# Altium PCB PDB.PcbDoc (part 2 of 3)
Units mil, origin at the board's own origin, x right, y up, seen from the top; angles counter-clockwise.
Board outline 4724.41 x 3149.61 mil, 2 copper layers (Top Layer, Bottom Layer); 64 components, 33 nets, 163 pads, 36 vias.
Unrouted connection lines stored in the file: 2.
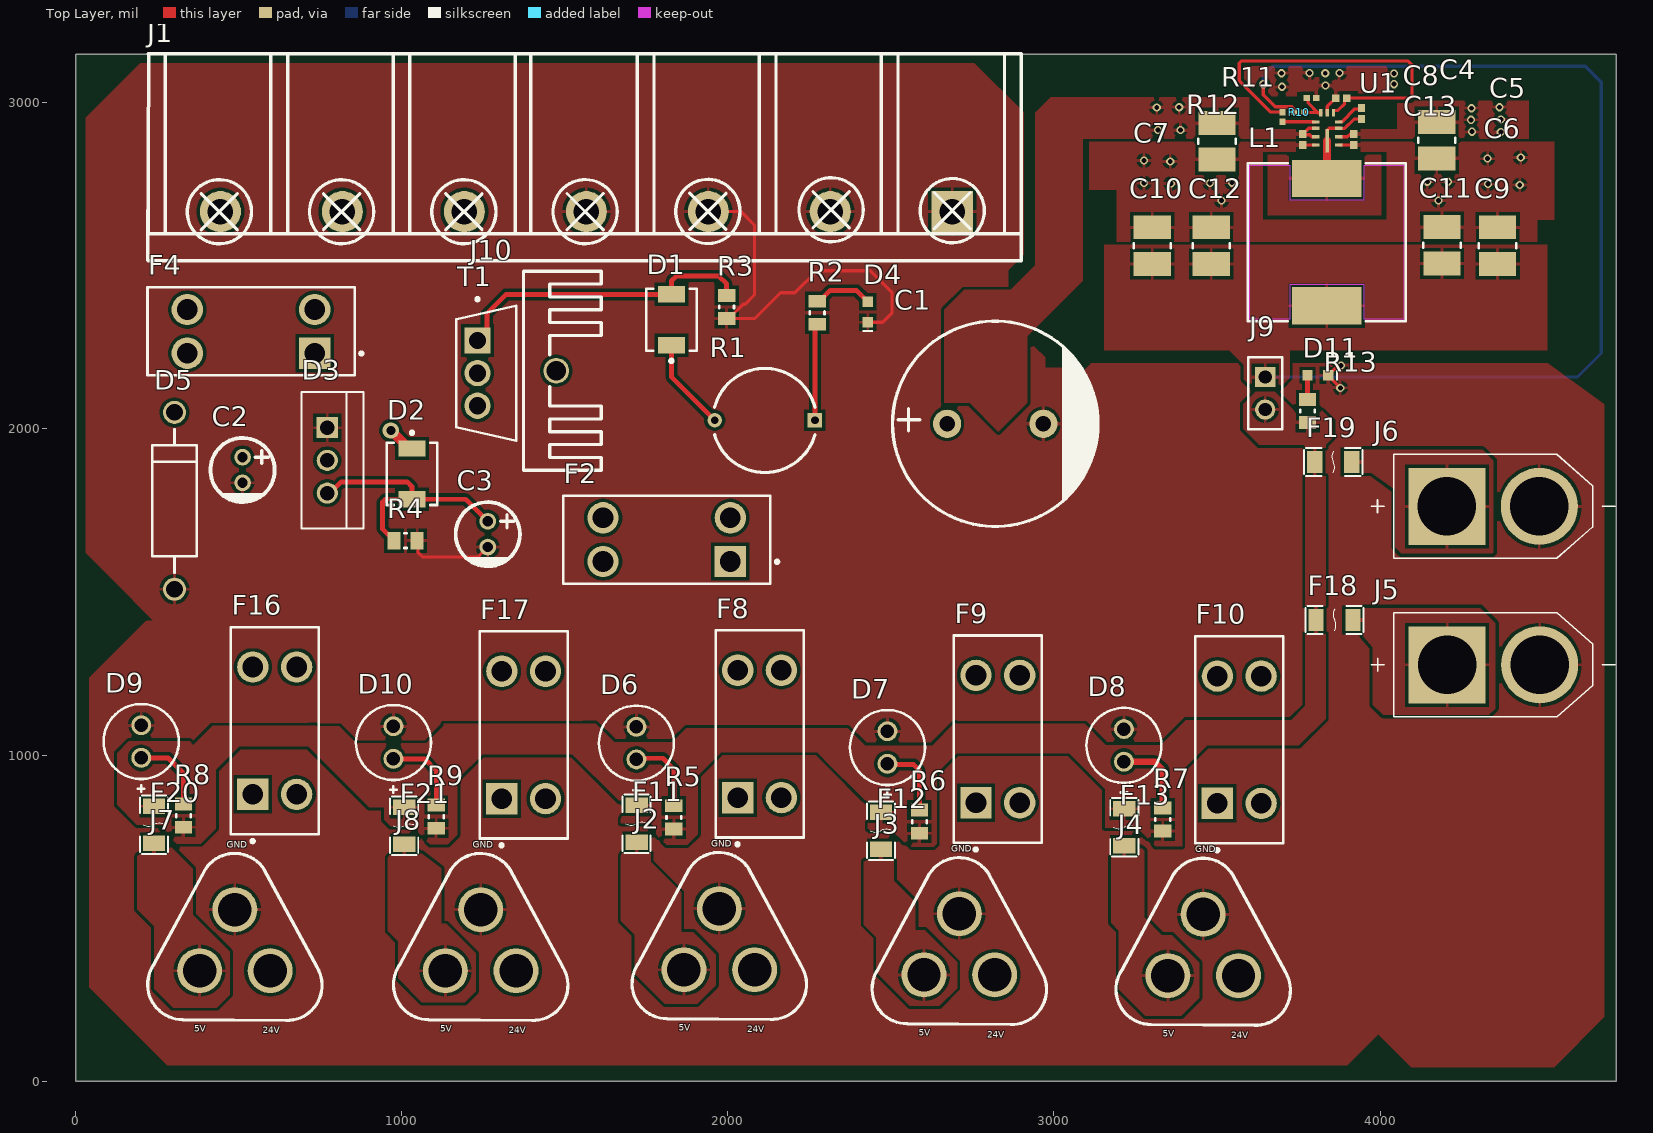
[diagram p0: Top Layer view]

## Part data (continued)
D5: library part P6KE27ARLG, "600 Watt SUR40 Transient Voltage Suppressor, 27 V, Unidirectional", Breakdown Voltage=27.05V, Case/Package=Axial, Clamping Voltage=37.5V, LCSC Part No=C3707914, Leakage Current=5µA, Manufacturer=onsemi, Max Breakdown Voltage=28.4V, Max Operating Temperature=150°C, Max Power Dissipation=5W, Max Surge Current=16A, Min Breakdown Voltage=25.7V, Min Operating Temperature=-55°C, Operating Supply Voltage=23.1V, Peak Pulse Power=600W, Power Line Protection=No, Supplier Part Number=P6KE27ARLG-158866, Test Current=1mA, Category="TVS Diodes", China RoHS=Non-Compliant, componentlink1description=https://datasheet.octopart.com:443/P6KE27ARLG-ON-Semiconductor-datasheet-8361193.pdf?src-supplier=IHS, componentlink1url=https://datasheet.octopart.com:443/P6KE27ARLG-ON-Semiconductor-datasheet-8361193.pdf?src-supplier=IHS, ComponentLink2Description=https://datasheet.octopart.com:443/P6KE27ARLG-ON-Semiconductor-datasheet-5320614.pdf?src-supplier=onsemi, ComponentLink2URL=https://datasheet.octopart.com:443/P6KE27ARLG-ON-Semiconductor-datasheet-5320614.pdf?src-supplier=onsemi, ComponentLink3Description=https://datasheet.octopart.com:443/P6KE27ARLG-onsemi-datasheet-79626349.pdf?src-supplier=Farnell, ComponentLink3URL=https://datasheet.octopart.com:443/P6KE27ARLG-onsemi-datasheet-79626349.pdf?src-supplier=Farnell, ComponentLink4Description=http://sigma.octopart.com:80/reach_statement/ON-Semiconductor-company-79.pdf?src-supplier=Compliance+Statements, ComponentLink4URL=http://sigma.octopart.com:80/reach_statement/ON-Semiconductor-company-79.pdf?src-supplier=Compliance+Statements, ComponentLink5Description=https://octopart.com:443/opatz8j6/c1?t=2cJTaBfKdbaYfiIibkn32kFJN2rkQAxk7M-zdmCFLNYhDS4Q_M0VQkaOAo5Ijtsf6TEss0vlvxYVSuDQTRZP4OvQV2pXsbQ98v0s9K6hdiFStXveO6nhAUnzDXp5xHxKIFKd8f_nnKbZC-l5hdBFgFSLLzjiWU1mRDFWwLSmSyFNQzmDyJ0WyQpSZN_85hCm8lhg27LncNlkqwz2W0BQiMb47LSU24ywtnWJBrffDSUFoIOy5DRvi26unpeOfRJUZq5vb6J1HvpVsqMMnuUvQDgpfylJ3jskX1SzE2wqL06L0laSWrQj0crcyI1tb60BYAje57qsLb2d2LwrmFq9ygYxyN3BPTigX2aIOQ&src-supplier=Compliance+Statements, ComponentLink5URL=https://octopart.com:443/opatz8j6/c1?t=2cJTaBfKdbaYfiIibkn32kFJN2rkQAxk7M-zdmCFLNYhDS4Q_M0VQkaOAo5Ijtsf6TEss0vlvxYVSuDQTRZP4OvQV2pXsbQ98v0s9K6hdiFStXveO6nhAUnzDXp5xHxKIFKd8f_nnKbZC-l5hdBFgFSLLzjiWU1mRDFWwLSmSyFNQzmDyJ0WyQpSZN_85hCm8lhg27LncNlkqwz2W0BQiMb47LSU24ywtnWJBrffDSUFoIOy5DRvi26unpeOfRJUZq5vb6J1HvpVsqMMnuUvQDgpfylJ3jskX1SzE2wqL06L0laSWrQj0crcyI1tb60BYAje57qsLb2d2LwrmFq9ygYxyN3BPTigX2aIOQ&src-supplier=Compliance+Statements, Composition=Zener, Contact Plating=Tin, Country of Origin="Mainland China", Direction=Unidirectional, Element Configuration=Single, Export Control Classification Number (ECCN) Code=EAR99, Harmonized Tariff Schedule (HTS) Code=8541.10.00.50, Introduction Date=1999-01-01, Lead Free="Lead Free", Manufacturer Part Number=P6KE27ARLG, Max Reverse Leakage Current=5µA, Number of Channels=1, Number of Elements=1, Number of Terminals=2, Number of Unidirectional Channels=1, Packaging="Tape and Reel", Peak Pulse Current=16A, Pins=2, Polarity=Unidirectional, Power Dissipation=600W, Pricing="100=0.06, 1000=0.06, 10000=0.06 (USD)", Radiation Hardening=No, REACH SVHC=No, Reverse Breakdown Voltage=25.7V, Reverse Standoff Voltage=23.1V, RoHS=Compliant, Stock=5900, Supplier="Bison Technologies", Termination=Axial
D6 D7 D8 D9 D10: library part HLMP-4740, "Round with Domed Top HLMP-4740 SINGLE COLOR LED Green LED Indication Discrete 6.1mm 5V 2mA 2.3mcd", Case/Package=Radial, Color=Green, Forward Current=7mA, Forward Voltage=2.2V, LCSC Part No=C7466713, Manufacturer=Broadcom, Max Operating Temperature=100°C, Max Power Dissipation=15.4mW, Min Operating Temperature=-20°C, Reverse Voltage=5V, Test Current=2mA, Category=LEDs, China RoHS=Compliant, componentlink1description=https://datasheet.octopart.com:443/HLMP-4740-Broadcom-datasheet-179994660.pdf?src-supplier=IHS, componentlink1url=https://datasheet.octopart.com:443/HLMP-4740-Broadcom-datasheet-179994660.pdf?src-supplier=IHS, ComponentLink2Description=https://datasheet.octopart.com:443/HLMP-4740-Broadcom-datasheet-10307821.pdf?src-supplier=Future+Electronics, ComponentLink2URL=https://datasheet.octopart.com:443/HLMP-4740-Broadcom-datasheet-10307821.pdf?src-supplier=Future+Electronics, ComponentLink3Description=https://datasheet.octopart.com:443/HLMP-4740-Avago-datasheet-8325423.pdf?src-supplier=Future+Electronics, ComponentLink3URL=https://datasheet.octopart.com:443/HLMP-4740-Avago-datasheet-8325423.pdf?src-supplier=Future+Electronics, ComponentLink4Description=https://datasheet.octopart.com:443/HLMP-4740-Broadcom-datasheet-41234193.pdf?src-supplier=Avago, ComponentLink4URL=https://datasheet.octopart.com:443/HLMP-4740-Broadcom-datasheet-41234193.pdf?src-supplier=Avago, ComponentLink5Description=https://datasheet.octopart.com:443/HLMP-4740-Broadcom-datasheet-26590252.pdf?src-supplier=Newark, ComponentLink5URL=https://datasheet.octopart.com:443/HLMP-4740-Broadcom-datasheet-26590252.pdf?src-supplier=Newark, ComponentLink6Description=https://datasheet.octopart.com:443/HLMP-4740-Avago-datasheet-3474.pdf?src-supplier=Newark, ComponentLink6URL=https://datasheet.octopart.com:443/HLMP-4740-Avago-datasheet-3474.pdf?src-supplier=Newark, ComponentLink7Description=https://datasheet.octopart.com:443/HLMP-4740-Avago-datasheet-15068216.pdf?src-supplier=element14+APAC, ComponentLink7URL=https://datasheet.octopart.com:443/HLMP-4740-Avago-datasheet-15068216.pdf?src-supplier=element14+APAC, ComponentLink8Description=https://datasheet.octopart.com:443/HLMP-4740-Avago-datasheet-9617573.pdf?src-supplier=RS+(Formerly+Allied+Electronics), ComponentLink8URL=https://datasheet.octopart.com:443/HLMP-4740-Avago-datasheet-9617573.pdf?src-supplier=RS+(Formerly+Allied+Electronics), ComponentLink9Description=https://datasheet.octopart.com:443/HLMP-4740-Avago-datasheet-87738.pdf?src-supplier=RS+(Formerly+Allied+Electronics), ComponentLink9URL=https://datasheet.octopart.com:443/HLMP-4740-Avago-datasheet-87738.pdf?src-supplier=RS+(Formerly+Allied+Electronics), Contact Plating=Tin, Depth=6.1mm, Diameter=5.08mm, Dominant Wavelength=569nm, Export Control Classification Number (ECCN) Code=EAR99, Harmonized Tariff Schedule (HTS) Code=8541.41.00.00, Height=8.81mm, Illumination Color=Green, Introduction Date=1992-01-01, Lead Free="Lead Free", Lead Length=25mm, Length=6.1mm, Lens Color=Green, Lens Size=5mm, Lens Style=Diffused, Lens Transparency=Diffused, Lifecycle Status=Production, Luminous Intensity=1mcd, Manufacturer Part Number=HLMP-4740, Mounting Technology="PCB, Through Hole", Number of Circuits=1, Number of Elements=1, Number of LEDs=1, Number of Terminals=1, Packaging=Bulk, Peak Wavelength=565nm, Pins=2, Power Dissipation=15.4mW, Pricing="2000=0.16434, 4000=0.16351, 8000=0.16268, 16000=0.16185, 32000=0.16102 (USD)", Radiation Hardening=No, REACH SVHC=Yes, RoHS=Compliant, Shape=Round, Stock=3902, Supplier=Avnet, Supplier Part Number=HLMP-4740, Terminal Pitch=2.54mm, Viewing Angle=50°, Wavelength=569nm
F2 F4 F8 F9 F10 F16 F17: library part 3568, "Holder; Fuse; Auto Blade; Mini; 500VAC; 30A; PC Pin Terminal; Nylon 4/6 Holder; Black", Color=Black, Current Rating=20A, Flammability Rating="UL94 V-0", Manufacturer=Keystone, Max Operating Temperature=145°C, Min Operating Temperature=-50°C, Voltage=500V, Approvals=UL, Body Material=Nylon, Category="Fuse Holders", componentlink1description=https://datasheet.octopart.com:443/3568-Keystone-datasheet-137335555.pdf?src-supplier=Upverter, componentlink1url=https://datasheet.octopart.com:443/3568-Keystone-datasheet-137335555.pdf?src-supplier=Upverter, ComponentLink2Description=https://datasheet.octopart.com:443/3568-Keystone-datasheet-15715963.pdf?src-supplier=Future+Electronics, ComponentLink2URL=https://datasheet.octopart.com:443/3568-Keystone-datasheet-15715963.pdf?src-supplier=Future+Electronics, ComponentLink3Description=https://datasheet.octopart.com:443/3568-Keystone-datasheet-7589202.pdf?src-supplier=Future+Electronics, ComponentLink3URL=https://datasheet.octopart.com:443/3568-Keystone-datasheet-7589202.pdf?src-supplier=Future+Electronics, ComponentLink4Description=https://datasheet.octopart.com:443/3568-Keystone-datasheet-137916591.pdf?src-supplier=Future+Electronics, ComponentLink4URL=https://datasheet.octopart.com:443/3568-Keystone-datasheet-137916591.pdf?src-supplier=Future+Electronics, ComponentLink5Description=https://datasheet.octopart.com:443/3568-Keystone-datasheet-21202853.pdf?src-supplier=element14+APAC, ComponentLink5URL=https://datasheet.octopart.com:443/3568-Keystone-datasheet-21202853.pdf?src-supplier=element14+APAC, ComponentLink6Description=https://datasheet.octopart.com:443/3568-Keystone-datasheet-10928834.pdf?src-supplier=RS+(Formerly+Allied+Electronics), ComponentLink6URL=https://datasheet.octopart.com:443/3568-Keystone-datasheet-10928834.pdf?src-supplier=RS+(Formerly+Allied+Electronics), ComponentLink7Description=https://datasheet.octopart.com:443/3568-Keystone-datasheet-110727069.pdf?src-supplier=RS+(Formerly+Allied+Electronics), ComponentLink7URL=https://datasheet.octopart.com:443/3568-Keystone-datasheet-110727069.pdf?src-supplier=RS+(Formerly+Allied+Electronics), ComponentLink8Description=https://datasheet.octopart.com:443/3568-Keystone-datasheet-17577430.pdf?src-supplier=TME, ComponentLink8URL=https://datasheet.octopart.com:443/3568-Keystone-datasheet-17577430.pdf?src-supplier=TME, Contact Material=Brass, Contact Plating=Tin, Country of Origin=USA, Depth=6.73mm, Fuse Current=20A, Illumination Type=Illuminated, Introduction Date=2015-08-28, Lead Free="Lead Free", Length=16mm, Lifecycle Status=Production, Manufacturer Part Number=3568, Material="Brass, Nylon, Tin", Mounting Technology="PCB, Vertical", Number of Circuits=1, Number of Poles=1, Orientation=Vertical, Pricing="30=0.74, 100=0.72, 250=0.71, 1000=0.69, 2500=0.66 (USD)", REACH SVHC=Yes, RoHS=Compliant, Stock=77707, Supplier="Future Electronics", Supplier Part Number=3568, Termination="PC Pin", Voltage Rating (AC)=500V
F11 F12 F13 F18 F19 F20 F21: library part 04661.25NRHF, "Fuse 63V Fa Halogen Free Slim 1206 1.25A/ T&r Rohs Compliant: Yes", Current Rating=1.25A, Manufacturer=Littelfuse, Max Operating Temperature=90°C, Min Operating Temperature=-55°C, Power Dissipation=107.1mW, Ratings="CE, CSA, TUV", Supplier Part Number=F11418CT-ND, Voltage Rating (AC)=63V, Category=Fuses, China RoHS=Compliant, componentlink1description=https://datasheet.octopart.com:443/04661.25NRHF-Littelfuse-datasheet-166915437.pdf?src-supplier=IHS, componentlink1url=https://datasheet.octopart.com:443/04661.25NRHF-Littelfuse-datasheet-166915437.pdf?src-supplier=IHS, ComponentLink2Description=https://datasheet.octopart.com:443/04661.25NRHF-Littelfuse-datasheet-120226766.pdf?src-supplier=ODG+(Origin+Data+Global), ComponentLink2URL=https://datasheet.octopart.com:443/04661.25NRHF-Littelfuse-datasheet-120226766.pdf?src-supplier=ODG+(Origin+Data+Global), ComponentLink3Description=https://datasheet.octopart.com:443/04661.25NRHF-Littelfuse-datasheet-170674135.pdf?src-supplier=JRH+Electronics, ComponentLink3URL=https://datasheet.octopart.com:443/04661.25NRHF-Littelfuse-datasheet-170674135.pdf?src-supplier=JRH+Electronics, ComponentLink4Description=https://datasheet.octopart.com:443/04661.25NRHF-Littelfuse-datasheet-178296321.pdf?src-supplier=Burklin+Elektronik, ComponentLink4URL=https://datasheet.octopart.com:443/04661.25NRHF-Littelfuse-datasheet-178296321.pdf?src-supplier=Burklin+Elektronik, ComponentLink5Description=https://datasheet.octopart.com:443/04661.25NRHF-Littelfuse-datasheet-183575681.pdf?src-supplier=Sager+Electronics, ComponentLink5URL=https://datasheet.octopart.com:443/04661.25NRHF-Littelfuse-datasheet-183575681.pdf?src-supplier=Sager+Electronics, ComponentLink6Description=https://datasheet.octopart.com:443/04661.25NRHF-Littelfuse-datasheet-24896369.pdf?src-supplier=Fuses+Unlimited, ComponentLink6URL=https://datasheet.octopart.com:443/04661.25NRHF-Littelfuse-datasheet-24896369.pdf?src-supplier=Fuses+Unlimited, Export Control Classification Number (ECCN) Code=EAR99, Harmonized Tariff Schedule (HTS) Code=8536.10.00.40, Height=584µm, Introduction Date=2008-01-16, Length=3.175mm, Lifecycle Status=Production, Manufacturer Part Number=04661.25NRHF, Mounting Technology="Surface Mount", Pricing="1=1.14, 5=0.946, 10=0.873, 50=0.7246, 100=0.6685, 250=0.60084, 500=0.55408, 1000=0.51077 (USD)", REACH SVHC=No, RoHS=Compliant, Stock=8292, Supplier=DigiKey, Time to Trip=200ms, Voltage Rating (DC)=63V
J1: library part "Terminal Connectors 6", "5.08mm Pitch Eurostyle Vertical Fixed Mount PCB Terminal Block, 6 Circuits", Color=Black, Current Rating=15A, Flammability Rating="UL94 V-0", LCSC Part No=C587506, Manufacturer=Molex, Manufacturer Lifecycle Status=ACTIVE, Manufacturer Part Number=39544-3006, Max Operating Temperature=105°C, Min Operating Temperature=-40°C, Supplier Part Number=0395443006, Voltage Rating=300V, Approvals="UL, cUL", Category="Terminal Blocks", China RoHS=Compliant, componentlink1description=https://datasheet.octopart.com:443/395443006-Molex-datasheet-138897636.pdf?src-supplier=IHS, componentlink1url=https://datasheet.octopart.com:443/395443006-Molex-datasheet-138897636.pdf?src-supplier=IHS, ComponentLink2Description=https://datasheet.octopart.com:443/39544-3006-Molex-datasheet-15647497.pdf?src-supplier=Molex, ComponentLink2URL=https://datasheet.octopart.com:443/39544-3006-Molex-datasheet-15647497.pdf?src-supplier=Molex, ComponentLink3Description=https://datasheet.octopart.com:443/395443006-Molex-datasheet-8340186.pdf?src-supplier=Molex, ComponentLink3URL=https://datasheet.octopart.com:443/395443006-Molex-datasheet-8340186.pdf?src-supplier=Molex, ComponentLink4Description=https://datasheet.octopart.com:443/39544-3006-Molex-datasheet-193100652.pdf?src-supplier=JRH+Electronics, ComponentLink4URL=https://datasheet.octopart.com:443/39544-3006-Molex-datasheet-193100652.pdf?src-supplier=JRH+Electronics, ComponentLink5Description=https://datasheet.octopart.com:443/39544-3006-Molex-datasheet-101582495.pdf?src-supplier=Farnell, ComponentLink5URL=https://datasheet.octopart.com:443/39544-3006-Molex-datasheet-101582495.pdf?src-supplier=Farnell, ComponentLink6Description=https://datasheet.octopart.com:443/39544-3006-Molex-datasheet-154750061.pdf?src-supplier=Master+Electronics, ComponentLink6URL=https://datasheet.octopart.com:443/39544-3006-Molex-datasheet-154750061.pdf?src-supplier=Master+Electronics, ComponentLink7Description=https://datasheet.octopart.com:443/39544-3006-Molex-datasheet-62280869.pdf?src-supplier=Electro+Sonic, ComponentLink7URL=https://datasheet.octopart.com:443/39544-3006-Molex-datasheet-62280869.pdf?src-supplier=Electro+Sonic, ComponentLink8Description=https://datasheet.octopart.com:443/39544-3006-Molex-datasheet-44402560.pdf?src-supplier=Electro+Sonic, ComponentLink8URL=https://datasheet.octopart.com:443/39544-3006-Molex-datasheet-44402560.pdf?src-supplier=Electro+Sonic, ComponentLink9Description=https://datasheet.octopart.com:443/39544-3006-Molex-datasheet-34199391.pdf?src-supplier=Newark, ComponentLink9URL=https://datasheet.octopart.com:443/39544-3006-Molex-datasheet-34199391.pdf?src-supplier=Newark, ComponentLink10Description=https://datasheet.octopart.com:443/39544-3006-Molex-datasheet-33003022.pdf?src-supplier=Newark, ComponentLink10URL=https://datasheet.octopart.com:443/39544-3006-Molex-datasheet-33003022.pdf?src-supplier=Newark, ComponentLink11Description=https://datasheet.octopart.com:443/39544-3006-Molex-datasheet-21207647.pdf?src-supplier=Newark, ComponentLink11URL=https://datasheet.octopart.com:443/39544-3006-Molex-datasheet-21207647.pdf?src-supplier=Newark, ComponentLink12Description=https://datasheet.octopart.com:443/39544-3006-Molex-datasheet-5315843.pdf?src-supplier=Verical, ComponentLink12URL=https://datasheet.octopart.com:443/39544-3006-Molex-datasheet-5315843.pdf?src-supplier=Verical, ComponentLink13Description=https://datasheet.octopart.com:443/39544-3006-Molex-datasheet-118853.pdf?src-supplier=DigiKey, ComponentLink13URL=https://datasheet.octopart.com:443/39544-3006-Molex-datasheet-118853.pdf?src-supplier=DigiKey, ComponentLink14Description=https://datasheet.octopart.com:443/39544-3006-Molex-datasheet-20203.pdf?src-supplier=element14, ComponentLink14URL=https://datasheet.octopart.com:443/39544-3006-Molex-datasheet-20203.pdf?src-supplier=element14, ComponentLink15Description=http://sigma.octopart.com:80/15647498/rohs_certificate/Molex-39544-3006.pdf?src-supplier=Compliance+Statements, ComponentLink15URL=http://sigma.octopart.com:80/15647498/rohs_certificate/Molex-39544-3006.pdf?src-supplier=Compliance+Statements, ComponentLink16Description=http://sigma.octopart.com:80/reach_statement/Molex-company-74.pdf?src-supplier=Compliance+Statements, ComponentLink16URL=http://sigma.octopart.com:80/reach_statement/Molex-company-74.pdf?src-supplier=Compliance+Statements, ComponentLink17Description=http://sigma.octopart.com:80/rohs_statement/Molex-company-73.pdf?src-supplier=Compliance+Statements, ComponentLink17URL=http://sigma.octopart.com:80/rohs_statement/Molex-company-73.pdf?src-supplier=Compliance+Statements, ComponentLink18Description=http://sigma.octopart.com:80/conflict_mineral_statement/Molex-company-72.pdf?src-supplier=Compliance+Statements, ComponentLink18URL=http://sigma.octopart.com:80/conflict_mineral_statement/Molex-company-72.pdf?src-supplier=Compliance+Statements, Contact Material=Brass, Contact Plating=Tin, Country of Origin=US, ELV=Compliant, Export Control Classification Number (ECCN) Code=EAR99, Halogen Free="Low Halogen", Harmonized Tariff Schedule (HTS) Code=8536.90.40.00, Height=14.4mm, Housing Color=Black, Housing Material=Nylon, Introduction Date=2007-04-03, Lead Free="Lead Free", Length=30.48mm, Lifecycle Status=Production, Mounting Technology=Screw, Number of Circuits=5, Number of Contacts=6, Number of Levels=1, Number of Positions=6, Number of Rows=1, Orientation=Vertical, Packaging=Bulk, Pins=6, Pitch=5.08mm, Pricing="1=2.8662, 10=2.1815, 25=1.9364, 50=1.7714, 100=1.6311, 480=1.4072, 960=1.353 (USD)", REACH SVHC=No, RoHS=Compliant, Schedule B="8536695050, 8536695050|8536695050|8536695050|8536695050|8536695050", Stock=960, Supplier="Arrow Electronics", Termination=Solder, Wire/Cable Gauge=12AWG
J2 J3 J4 J7 J8: library part MT-60, LCSC part #=C99176
J5 J6: library part PRT-10474, "Conn DC Power Adapter M/F 2 POS ST 2 Terminal 1 Port", Manufacturer=SparkFun, Category="Headers and Wire Housings", componentlink1description=https://datasheet.octopart.com:443/PRT-10474-SparkFun-datasheet-154936240.pdf?src-supplier=Upverter, componentlink1url=https://datasheet.octopart.com:443/PRT-10474-SparkFun-datasheet-154936240.pdf?src-supplier=Upverter, Manufacturer Part Number=PRT-10474, Number of Contacts=2, Number of Rows=1, Pricing="1=3.279 (USD)", RoHS=Compliant, Supplier="Arrow Electronics", Supplier Part Number=PRT-10474
J9: library part M20-9990246, "CONN HEADER VERT 2POS 2.54MM / Connector Header Through Hole 2 position 0.100\" (2.54mm)", Case/Package=SIL, Color=Black, Contact Resistance=30mΩ, Current Rating=3A, Dielectric Material=Polyamide, Insulation Resistance=1GΩ, LCSC Part No=C3332353, Manufacturer=Harwin, Max Operating Temperature=105°C, Min Operating Temperature=-40°C, Supplier Part Number=952-2262-ND, Voltage Rating (AC)=750V, Category="Headers and Wire Housings", componentlink1description=https://datasheet.octopart.com:443/M20-9990246-Harwin-datasheet-169407857.pdf?src-supplier=Newark, componentlink1url=https://datasheet.octopart.com:443/M20-9990246-Harwin-datasheet-169407857.pdf?src-supplier=Newark, ComponentLink2Description=https://datasheet.octopart.com:443/M20-9990246-Harwin-datasheet-27378916.pdf?src-supplier=Newark, ComponentLink2URL=https://datasheet.octopart.com:443/M20-9990246-Harwin-datasheet-27378916.pdf?src-supplier=Newark, ComponentLink3Description=https://datasheet.octopart.com:443/M20-9990246-Harwin-datasheet-96624206.pdf?src-supplier=element14+APAC, ComponentLink3URL=https://datasheet.octopart.com:443/M20-9990246-Harwin-datasheet-96624206.pdf?src-supplier=element14+APAC, ComponentLink4Description=https://datasheet.octopart.com:443/M20-9990246-Harwin-datasheet-32864541.pdf?src-supplier=Farnell, ComponentLink4URL=https://datasheet.octopart.com:443/M20-9990246-Harwin-datasheet-32864541.pdf?src-supplier=Farnell, ComponentLink5Description=https://datasheet.octopart.com:443/M20-9990246-Harwin-datasheet-7538443.pdf?src-supplier=Farnell, ComponentLink5URL=https://datasheet.octopart.com:443/M20-9990246-Harwin-datasheet-7538443.pdf?src-supplier=Farnell, ComponentLink6Description=https://datasheet.octopart.com:443/M20-9990246-Harwin-datasheet-508868.pdf?src-supplier=Farnell, ComponentLink6URL=https://datasheet.octopart.com:443/M20-9990246-Harwin-datasheet-508868.pdf?src-supplier=Farnell, Connector Type="Male Pin", Contact Material=Brass, Contact Mating Length=6.096mm, Contact Plating=Tin, Country of Origin=Taiwan, Depth=2.54mm, Export Control Classification Number (ECCN) Code=EAR99, Gender=Male, Harmonized Tariff Schedule (HTS) Code=8536.69.40.40, Height=8.99mm, Housing Color=Black, Housing Material=Nylon, Introduction Date=2005-06-27, Lead Pitch=2.54mm, Length=5.08mm, Lifecycle Status=Production, Manufacturer Part Number=M20-9990246, Max Current Rating=3A, Mounting Technology="Through Hole", Number of Contacts=2, Number of Positions=2, Number of Rows=1, Orientation=Straight, Packaging=Bulk, Pins=2, Pitch=2.54mm, Pricing="1=0.1, 10=0.079, 100=0.0669, 500=0.0597, 1000=0.05684, 5000=0.05073, 10000=0.04831 (USD)", Radiation Hardening=No, REACH SVHC=Yes, RoHS=Compliant, Stock=114297, Supplier=DigiKey, Terminal Pitch=2.54mm, Termination=Solder
J10: library part 513001B02500G, "TO-220 Package 13.4 C/W Thermal Resistance Large Radial Fin Heat Sink", Case/Package=TO-218, Color=Black, Manufacturer="Aavid Thermalloy", Natural Thermal Resistance=13.4°C/W, Supplier Part Number=532-513001B25G, Thermal Resistance @ Forced Air Flow (100 LFM)=4°C/W, Category="Heat Sinks", componentlink1description=https://datasheet.octopart.com:443/513001B02500G-Aavid-Thermalloy-datasheet-111182914.pdf?src-supplier=IHS, componentlink1url=https://datasheet.octopart.com:443/513001B02500G-Aavid-Thermalloy-datasheet-111182914.pdf?src-supplier=IHS, ComponentLink2Description=https://datasheet.octopart.com:443/513001B02500G-Aavid-Thermalloy-datasheet-182190711.pdf?src-supplier=IHS, ComponentLink2URL=https://datasheet.octopart.com:443/513001B02500G-Aavid-Thermalloy-datasheet-182190711.pdf?src-supplier=IHS, ComponentLink3Description=https://datasheet.octopart.com:443/513001B02500G-Aavid-Thermalloy-datasheet-116638641.pdf?src-supplier=Sager+Electronics, ComponentLink3URL=https://datasheet.octopart.com:443/513001B02500G-Aavid-Thermalloy-datasheet-116638641.pdf?src-supplier=Sager+Electronics, ComponentLink4Description=https://datasheet.octopart.com:443/513001B02500G-Aavid-Thermalloy-datasheet-12547168.pdf?src-supplier=Future+Electronics, ComponentLink4URL=https://datasheet.octopart.com:443/513001B02500G-Aavid-Thermalloy-datasheet-12547168.pdf?src-supplier=Future+Electronics, ComponentLink5Description=https://datasheet.octopart.com:443/513001B02500G-Aavid-Thermalloy-datasheet-12511871.pdf?src-supplier=Future+Electronics, ComponentLink5URL=https://datasheet.octopart.com:443/513001B02500G-Aavid-Thermalloy-datasheet-12511871.pdf?src-supplier=Future+Electronics, ComponentLink6Description=http://sigma.octopart.com:80/conflict_mineral_statement/Aavid-Thermalloy-company-26.pdf?src-supplier=Compliance+Statements, ComponentLink6URL=http://sigma.octopart.com:80/conflict_mineral_statement/Aavid-Thermalloy-company-26.pdf?src-supplier=Compliance+Statements, Depth=12.7mm, Export Control Classification Number (ECCN) Code=EAR99, Harmonized Tariff Schedule (HTS) Code=8541.90.00.00, Height=25.4mm, Height Off Base=12.7mm, Introduction Date=2012-05-15, Lead Free="Lead Free", Length=34.92mm, Lifecycle Status=Production, Manufacturer Part Number=513001B02500G, Material="Aluminium, Anodized", Mounting Technology="Through Hole", Packaging=Box, Pricing="1=1.68, 10=1.53, 50=1.45, 100=1.37, 1000=1.09, 10000=1.08 (USD)", RoHS=Compliant, Shape="Fins, Rectangular", Stock=6491, Supplier=Mouser, Type=Passive, Width=12.7mm
L1: library part 744771008, "Power Inductor, SMT, 1260, 8.2 Uh, 6.25 A, .02 Ohm, Fixed, We-pd Series", Ambient Temperature Range High=85°C, Ambient Temperature Range Low=-40°C, Case/Package=Nonstandard, Current Rating=6.2A, DC Resistance (DCR)=15.5mΩ, Inductance Tolerance=20%, Manufacturer="Wurth Elektronik", Max DC Current=6.25A, Max Operating Temperature=125°C, Self Resonant Frequency=25MHz, Supplier Part Number=732-1207-1-ND, Test Frequency=1kHz, Category="Fixed Inductors", componentlink1description=https://datasheet.octopart.com:443/744771008-Wurth-Elektronik-datasheet-168492728.pdf?src-supplier=Wurth+Elektronik, componentlink1url=https://datasheet.octopart.com:443/744771008-Wurth-Elektronik-datasheet-168492728.pdf?src-supplier=Wurth+Elektronik, ComponentLink2Description=https://datasheet.octopart.com:443/744771008-W%C3%BCrth-Elektronik-datasheet-142051527.pdf?src-supplier=Farnell, ComponentLink2URL=https://datasheet.octopart.com:443/744771008-W%C3%BCrth-Elektronik-datasheet-142051527.pdf?src-supplier=Farnell, ComponentLink3Description=https://datasheet.octopart.com:443/744771008-W%C3%BCrth-Elektronik-Midcom-datasheet-5337310.pdf?src-supplier=Farnell, ComponentLink3URL=https://datasheet.octopart.com:443/744771008-W%C3%BCrth-Elektronik-Midcom-datasheet-5337310.pdf?src-supplier=Farnell, ComponentLink4Description=https://datasheet.octopart.com:443/744771008-W%C3%BCrth-Elektronik-datasheet-17695912.pdf?src-supplier=HQonline, ComponentLink4URL=https://datasheet.octopart.com:443/744771008-W%C3%BCrth-Elektronik-datasheet-17695912.pdf?src-supplier=HQonline, ComponentLink5Description=https://datasheet.octopart.com:443/744771008-W%C3%BCrth-Elektronik-datasheet-41343275.pdf?src-supplier=element14+APAC, ComponentLink5URL=https://datasheet.octopart.com:443/744771008-W%C3%BCrth-Elektronik-datasheet-41343275.pdf?src-supplier=element14+APAC, Composition=Wirewound, Core Material=Ferrite, Depth=12mm, ESR=20mΩ, Height=6mm, Height - Seated (Max)=5.9944mm, Lead Free="Lead Free", Length=12mm, Manufacturer Part Number=744771008, Min Operating Temperature=-40°C, Mounting Technology="Surface Mount", Pins=2, Pricing="1=2.26, 10=2.172, 50=1.961, 100=1.759, 250=1.61 (USD)", RMS Current (Irms)=6.25A, RoHS=Compliant, Saturation Current=6.2A, Shielding=Shielded, Stock=330, Supplier=DigiKey, Termination=SMD/SMT, Tolerance=20%, Weight=4.535924g, Width=12mm
R1: library part SL320R230, "NTC Thermistor, 0.3ohm, Through Hole Mount", Current Rating=30A, LCSC Part No=C3761746, Manufacturer=Vishay, Max Operating Temperature=150°C, Min Operating Temperature=-40°C, Ratings=CSA, Supplier Part Number=570-SL320R230-ND, Tolerance=25%, Category=Resistors, componentlink1description=https://datasheet.octopart.com:443/SL320R230-Vishay-datasheet-189867316.pdf?src-supplier=Vishay, componentlink1url=https://datasheet.octopart.com:443/SL320R230-Vishay-datasheet-189867316.pdf?src-supplier=Vishay, ComponentLink2Description=https://datasheet.octopart.com:443/SL320R230-Ametherm-datasheet-182141257.pdf?src-supplier=Sager+Electronics, ComponentLink2URL=https://datasheet.octopart.com:443/SL320R230-Ametherm-datasheet-182141257.pdf?src-supplier=Sager+Electronics, ComponentLink3Description=http://sigma.octopart.com:80/rohs_statement/Vishay-company-15.pdf?src-supplier=Compliance+Statements, ComponentLink3URL=http://sigma.octopart.com:80/rohs_statement/Vishay-company-15.pdf?src-supplier=Compliance+Statements, Country of Origin=USA, Diameter=31mm, Dissipation Factor=45.4%, Export Control Classification Number (ECCN) Code=EAR99, Harmonized Tariff Schedule (HTS) Code=8533.40.80.70, Height=31mm, Introduction Date=2025-08-07, Lead Diameter=1mm, Lead Pitch=7.8mm, Length=31mm, Lifecycle Status=Production, Manufacturer Part Number=SL320R230, Number of Terminals=2, Packaging=Bulk, Pricing="1=9.59, 5=7.958, 10=7.344, 50=6.0892, 100=5.6147, 250=5.0404, 500=4.64248, 1000=4.27324 (USD)", REACH SVHC=No, RoHS=Compliant, Stock=164, Supplier=DigiKey, Width=6mm
R2: library part SR0805JR-7W2K2L, "Res Thick Film 0805 2.2K Ohm 5% 0.25W(1/4W) 100ppm/C Pad SMD T/R Automotive", Case/Package=0805, LCSC Part No=C873872, Manufacturer="Yageo Group", Max Operating Temperature=155°C, Max Power Dissipation=250mW, Min Operating Temperature=-55°C, Ratings=AEC-Q200, Supplier Part Number=YAG6054CT-ND, Temperature Coefficient=100ppm/°C, Tolerance=5%, Working Voltage=500V, Category="Chip SMD Resistors", China RoHS=Non-Compliant, componentlink1description=https://datasheet.octopart.com:443/SR0805JR-7W2K2L-Yageo-datasheet-176402240.pdf?src-supplier=Farnell, componentlink1url=https://datasheet.octopart.com:443/SR0805JR-7W2K2L-Yageo-datasheet-176402240.pdf?src-supplier=Farnell, ComponentLink2Description=https://datasheet.octopart.com/SR0805JR-7W2K2L-Yageo-datasheet-11047080.pdf, ComponentLink2URL=https://datasheet.octopart.com/SR0805JR-7W2K2L-Yageo-datasheet-11047080.pdf, ComponentLink3Description=http://sigma.octopart.com:80/conflict_mineral_statement/Yageo-company-3.pdf?src-supplier=Compliance+Statements, ComponentLink3URL=http://sigma.octopart.com:80/conflict_mineral_statement/Yageo-company-3.pdf?src-supplier=Compliance+Statements, ComponentLink4Description=http://sigma.octopart.com:80/rohs_statement/Yageo-company-2.pdf?src-supplier=Compliance+Statements, ComponentLink4URL=http://sigma.octopart.com:80/rohs_statement/Yageo-company-2.pdf?src-supplier=Compliance+Statements, Composition="Thick Film", Country of Origin="Mainland China, Taiwan", Export Control Classification Number (ECCN) Code=EAR99, Features="Automotive AEC-Q200", Harmonized Tariff Schedule (HTS) Code=8533.21.00.30, Height=500µm, Introduction Date=2015-07-31, Length=2mm, Lifecycle Status=Production, Manufacturer Part Number=SR0805JR-7W2K2L, Mounting Technology="Surface Mount", Number of Terminals=2, Number of Terminations=2, Packaging="Tape & Reel", Power Rating=250mW, Pricing="1=0.21, 10=0.108, 25=0.0856, 50=0.073, 100=0.063, 250=0.05284, 500=0.04704, 1000=0.04244 (USD)", REACH SVHC=Yes, RoHS=Compliant, Stock=12893, Supplier=DigiKey, Width=1.25mm
R3: library part RC0805FR-0710KL, "Res General Purpose Thick Film 0805 10k Ohm 1% 1/8W ±100ppm/°C Ceramic Paper T/R", Case Code (Imperial)=0805, LCSC Part No=C84376, Manufacturer="Yageo Group", Max Operating Temperature=155°C, Max Power Dissipation=125mW, Min Operating Temperature=-55°C, Temperature Coefficient=100ppm/°C, Tolerance=1%, Voltage Rating=150V, Case/Package=0805, Category="Chip SMD Resistors", China RoHS=Non-Compliant, componentlink1description=https://datasheet.octopart.com:443/RC0805FR-0710KL-Yageo-datasheet-175887523.pdf?src-supplier=Newark, componentlink1url=https://datasheet.octopart.com:443/RC0805FR-0710KL-Yageo-datasheet-175887523.pdf?src-supplier=Newark, ComponentLink2Description=https://datasheet.octopart.com:443/RC0805FR-0710KL-Yageo-datasheet-62067350.pdf?src-supplier=Farnell, ComponentLink2URL=https://datasheet.octopart.com:443/RC0805FR-0710KL-Yageo-datasheet-62067350.pdf?src-supplier=Farnell, ComponentLink3Description=https://datasheet.octopart.com:443/RC0805FR-0710KL-Yageo-datasheet-13691069.pdf?src-supplier=Farnell, ComponentLink3URL=https://datasheet.octopart.com:443/RC0805FR-0710KL-Yageo-datasheet-13691069.pdf?src-supplier=Farnell, ComponentLink4Description=https://datasheet.octopart.com:443/RC0805FR-0710KL-Yageo-datasheet-103092701.pdf?src-supplier=Upverter, ComponentLink4URL=https://datasheet.octopart.com:443/RC0805FR-0710KL-Yageo-datasheet-103092701.pdf?src-supplier=Upverter, ComponentLink5Description=https://datasheet.octopart.com:443/RC0805FR-0710KL-Yageo-datasheet-98239111.pdf?src-supplier=Upverter, ComponentLink5URL=https://datasheet.octopart.com:443/RC0805FR-0710KL-Yageo-datasheet-98239111.pdf?src-supplier=Upverter, ComponentLink6Description=https://datasheet.octopart.com:443/RC0805FR-0710KL-Yageo---Phycomp-datasheet-67302840.pdf?src-supplier=Upverter, ComponentLink6URL=https://datasheet.octopart.com:443/RC0805FR-0710KL-Yageo---Phycomp-datasheet-67302840.pdf?src-supplier=Upverter, ComponentLink7Description=https://datasheet.octopart.com:443/RC0805FR-0710KL-Yageo-datasheet-8330313.pdf?src-supplier=element14+APAC, ComponentLink7URL=https://datasheet.octopart.com:443/RC0805FR-0710KL-Yageo-datasheet-8330313.pdf?src-supplier=element14+APAC, ComponentLink8Description=https://datasheet.octopart.com:443/RC0805FR-0710KL-Yageo-datasheet-12592811.pdf?src-supplier=element14+APAC, ComponentLink8URL=https://datasheet.octopart.com:443/RC0805FR-0710KL-Yageo-datasheet-12592811.pdf?src-supplier=element14+APAC, ComponentLink9Description=https://datasheet.octopart.com:443/RC0805FR-0710KL-Yageo-Group-datasheet-190305687.pdf?src-supplier=Future+Electronics, ComponentLink9URL=https://datasheet.octopart.com:443/RC0805FR-0710KL-Yageo-Group-datasheet-190305687.pdf?src-supplier=Future+Electronics, ComponentLink10Description=https://datasheet.octopart.com:443/RC0805FR-0710KL-Yageo-datasheet-164759695.pdf?src-supplier=Future+Electronics, ComponentLink10URL=https://datasheet.octopart.com:443/RC0805FR-0710KL-Yageo-datasheet-164759695.pdf?src-supplier=Future+Electronics, ComponentLink11Description=https://datasheet.octopart.com:443/RC0805FR-0710KL-Yageo-datasheet-15800360.pdf?src-supplier=Future+Electronics, ComponentLink11URL=https://datasheet.octopart.com:443/RC0805FR-0710KL-Yageo-datasheet-15800360.pdf?src-supplier=Future+Electronics, ComponentLink12Description=https://datasheet.octopart.com:443/RC0805FR-0710KL-Yageo-datasheet-8324252.pdf?src-supplier=Future+Electronics, ComponentLink12URL=https://datasheet.octopart.com:443/RC0805FR-0710KL-Yageo-datasheet-8324252.pdf?src-supplier=Future+Electronics, ComponentLink13Description=https://datasheet.octopart.com:443/RC0805FR-0710KL-Yageo-datasheet-79472498.pdf?src-supplier=Megastar, ComponentLink13URL=https://datasheet.octopart.com:443/RC0805FR-0710KL-Yageo-datasheet-79472498.pdf?src-supplier=Megastar, ComponentLink14Description=https://datasheet.octopart.com:443/RC0805FR-0710KL-Yageo-datasheet-27714392.pdf?src-supplier=Seeed+Studio, ComponentLink14URL=https://datasheet.octopart.com:443/RC0805FR-0710KL-Yageo-datasheet-27714392.pdf?src-supplier=Seeed+Studio, ComponentLink15Description=https://datasheet.octopart.com/RC0805FR-0710KL-Yageo-datasheet-73766026.pdf, ComponentLink15URL=https://datasheet.octopart.com/RC0805FR-0710KL-Yageo-datasheet-73766026.pdf, ComponentLink16Description=https://datasheet.octopart.com:443/RC0805FR-0710KL-Yageo-datasheet-118657.pdf?src-supplier=DigiKey, ComponentLink16URL=https://datasheet.octopart.com:443/RC0805FR-0710KL-Yageo-datasheet-118657.pdf?src-supplier=DigiKey, ComponentLink17Description=https://datasheet.octopart.com:443/RC0805FR-0710KL-Yageo-datasheet-502840.pdf?src-supplier=element14, ComponentLink17URL=https://datasheet.octopart.com:443/RC0805FR-0710KL-Yageo-datasheet-502840.pdf?src-supplier=element14, ComponentLink18Description=http://sigma.octopart.com:80/conflict_mineral_statement/Yageo-company-3.pdf?src-supplier=Compliance+Statements, ComponentLink18URL=http://sigma.octopart.com:80/conflict_mineral_statement/Yageo-company-3.pdf?src-supplier=Compliance+Statements, ComponentLink19Description=http://sigma.octopart.com:80/rohs_statement/Yageo-company-2.pdf?src-supplier=Compliance+Statements, ComponentLink19URL=http://sigma.octopart.com:80/rohs_statement/Yageo-company-2.pdf?src-supplier=Compliance+Statements, Composition="Thick Film", Contact Plating=Tin, Country of Origin="Mainland China, Taiwan", Depth=1.25mm, Export Control Classification Number (ECCN) Code=EAR99, Features="Moisture Resistant", Harmonized Tariff Schedule (HTS) Code=8533.21.00.30, Height=500µm, Introduction Date=2004-09-22, Lead Free="Lead Free", Length=2mm, Lifecycle Status=Production, Manufacturer Part Number=RC0805FR-0710KL, Military Standard=Not, Mounting Technology="Surface Mount", Number of Terminals=2, Number of Terminations=2, Packaging="Tape and Reel", Pins=2, Power Rating=125mW, Pricing="10000=0.0017, 50000=0.0017, 150000=0.0016, 375000=0.0016, 1000000=0.0015 (USD)", Radiation Hardening=No, REACH SVHC=Yes, RoHS=Compliant, Schedule B="8533210045, 8533210045|8533210045|8533210045|8533210045|8533210045|8533210045|8533210045|8533210045|8533210045|8533210045|8533210045|8533210045|8533210045|8533210045|8533210045|8533210045|8533210045|8533210045|8533210045|8533210045|8533210045|8533210045|8533210045|85", Stock=2395000, Supplier="Future Electronics", Supplier Part Number=RC0805FR-0710KL, Termination=SMD/SMT, Voltage Rating (AC)=150V, Voltage Rating (DC)=150V, Width=1.25mm, Working Voltage=150V
R4 R5 R6 R7 R8 R9 R13: library part RC0805FR-071KL, "Yageo RC0805FR-071KL SMD Resistor 0603 1k Ohm ±1% Thick Film", Case Code (Imperial)=0805, LCSC Part No=C95781, Manufacturer="Yageo Group", Max Operating Temperature=155°C, Max Power Dissipation=125mW, Min Operating Temperature=-55°C, Temperature Coefficient=100ppm/°C, Tolerance=1%, Voltage Rating=150V, Case/Package=0805, Category="Chip SMD Resistors", China RoHS=Non-Compliant, componentlink1description=https://datasheet.octopart.com:443/RC0805FR-071KL-Yageo-datasheet-175887523.pdf?src-supplier=IHS, componentlink1url=https://datasheet.octopart.com:443/RC0805FR-071KL-Yageo-datasheet-175887523.pdf?src-supplier=IHS, ComponentLink2Description=https://datasheet.octopart.com:443/RC0805FR-071KL-Yageo-datasheet-103092701.pdf?src-supplier=Upverter, ComponentLink2URL=https://datasheet.octopart.com:443/RC0805FR-071KL-Yageo-datasheet-103092701.pdf?src-supplier=Upverter, ComponentLink3Description=https://datasheet.octopart.com:443/RC0805FR-071KL-Yageo-datasheet-8330313.pdf?src-supplier=element14+APAC, ComponentLink3URL=https://datasheet.octopart.com:443/RC0805FR-071KL-Yageo-datasheet-8330313.pdf?src-supplier=element14+APAC, ComponentLink4Description=https://datasheet.octopart.com:443/RC0805FR-071KL-Yageo-datasheet-62067350.pdf?src-supplier=element14+APAC, ComponentLink4URL=https://datasheet.octopart.com:443/RC0805FR-071KL-Yageo-datasheet-62067350.pdf?src-supplier=element14+APAC, ComponentLink5Description=https://datasheet.octopart.com:443/RC0805FR-071KL-Yageo-datasheet-12592811.pdf?src-supplier=element14+APAC, ComponentLink5URL=https://datasheet.octopart.com:443/RC0805FR-071KL-Yageo-datasheet-12592811.pdf?src-supplier=element14+APAC, ComponentLink6Description=https://datasheet.octopart.com:443/RC0805FR-071KL-Yageo-Group-datasheet-190305687.pdf?src-supplier=Newark, ComponentLink6URL=https://datasheet.octopart.com:443/RC0805FR-071KL-Yageo-Group-datasheet-190305687.pdf?src-supplier=Newark, ComponentLink7Description=https://datasheet.octopart.com:443/RC0805FR-071KL-Yageo-Group-datasheet-176638170.pdf?src-supplier=Future+Electronics, ComponentLink7URL=https://datasheet.octopart.com:443/RC0805FR-071KL-Yageo-Group-datasheet-176638170.pdf?src-supplier=Future+Electronics, ComponentLink8Description=https://datasheet.octopart.com:443/RC0805FR-071KL-Yageo-datasheet-164759695.pdf?src-supplier=Future+Electronics, ComponentLink8URL=https://datasheet.octopart.com:443/RC0805FR-071KL-Yageo-datasheet-164759695.pdf?src-supplier=Future+Electronics, ComponentLink9Description=https://datasheet.octopart.com:443/RC0805FR-071KL-Yageo-datasheet-8324252.pdf?src-supplier=Future+Electronics, ComponentLink9URL=https://datasheet.octopart.com:443/RC0805FR-071KL-Yageo-datasheet-8324252.pdf?src-supplier=Future+Electronics, ComponentLink10Description=https://datasheet.octopart.com:443/RC0805FR-071KL-Yageo-datasheet-79472498.pdf?src-supplier=Megastar, ComponentLink10URL=https://datasheet.octopart.com:443/RC0805FR-071KL-Yageo-datasheet-79472498.pdf?src-supplier=Megastar, ComponentLink11Description=https://datasheet.octopart.com/RC0805FR-071KL-Yageo-datasheet-73766026.pdf, ComponentLink11URL=https://datasheet.octopart.com/RC0805FR-071KL-Yageo-datasheet-73766026.pdf, ComponentLink12Description=https://datasheet.octopart.com:443/RC0805FR-071KL-Yageo-datasheet-13691069.pdf?src-supplier=Farnell, ComponentLink12URL=https://datasheet.octopart.com:443/RC0805FR-071KL-Yageo-datasheet-13691069.pdf?src-supplier=Farnell, ComponentLink13Description=https://datasheet.octopart.com:443/RC0805FR-071KL-Yageo-datasheet-118657.pdf?src-supplier=DigiKey, ComponentLink13URL=https://datasheet.octopart.com:443/RC0805FR-071KL-Yageo-datasheet-118657.pdf?src-supplier=DigiKey, ComponentLink14Description=https://datasheet.octopart.com:443/RC0805FR-071KL-Yageo-datasheet-502840.pdf?src-supplier=element14, ComponentLink14URL=https://datasheet.octopart.com:443/RC0805FR-071KL-Yageo-datasheet-502840.pdf?src-supplier=element14, ComponentLink15Description=http://sigma.octopart.com:80/conflict_mineral_statement/Yageo-company-3.pdf?src-supplier=Compliance+Statements, ComponentLink15URL=http://sigma.octopart.com:80/conflict_mineral_statement/Yageo-company-3.pdf?src-supplier=Compliance+Statements, ComponentLink16Description=http://sigma.octopart.com:80/rohs_statement/Yageo-company-2.pdf?src-supplier=Compliance+Statements, ComponentLink16URL=http://sigma.octopart.com:80/rohs_statement/Yageo-company-2.pdf?src-supplier=Compliance+Statements, Composition="Thick Film", Contact Plating=Tin, Country of Origin="Mainland China, Taiwan", Depth=1.25mm, Export Control Classification Number (ECCN) Code=EAR99, Features="Moisture Resistant", Harmonized Tariff Schedule (HTS) Code=8533.21.00.30, Height=500µm, Introduction Date=2004-09-22, Lead Free="Lead Free", Length=2mm, Lifecycle Status=Production, Manufacturer Part Number=RC0805FR-071KL, Military Standard=Not, Mounting Technology="Surface Mount", Number of Terminals=2, Number of Terminations=2, Packaging="Tape & Reel", Pins=2, Power Rating=125mW, Pricing="10000=0.0017, 50000=0.0017, 150000=0.0016, 375000=0.0016, 1000000=0.0015 (USD)", Radiation Hardening=No, REACH SVHC=Yes, RoHS=Compliant, Schedule B="8533210045, 8533210045|8533210045, 8533210045|8533210045|8533210045, 8533210045|8533210045|8533210045|8533210045", Stock=3035000, Supplier="Future Electronics", Supplier Part Number=RC0805FR-071KL, Termination=SMD/SMT, Voltage Rating (AC)=150V, Voltage Rating (DC)=150V, Width=1.25mm, Working Voltage=150V
R10 R12: library part RC0402FR-07100KL, "62.5mW Thick Film Resistors 50V ±100ppm/℃ ±1% 100kΩ 0402 Chip Resistor - Surface Mount ROHS", Case Code (Imperial)=0402, Manufacturer="Yageo Group", Max Operating Temperature=155°C, Max Power Dissipation=63mW, Min Operating Temperature=-55°C, Power Rating=62.5mW, Temperature Coefficient=100ppm/°C, Tolerance=1%, Voltage Rating=50V, Case Code (Metric)=0402, Case/Package=0402, Category="Chip SMD Resistors", China RoHS=Non-Compliant, componentlink1description=https://datasheet.octopart.com:443/RC0402FR-07100KL-Yageo-datasheet-175887523.pdf?src-supplier=Newark, componentlink1url=https://datasheet.octopart.com:443/RC0402FR-07100KL-Yageo-datasheet-175887523.pdf?src-supplier=Newark, ComponentLink2Description=https://datasheet.octopart.com:443/RC0402FR-07100KL-Yageo-datasheet-10408619.pdf?src-supplier=Newark, ComponentLink2URL=https://datasheet.octopart.com:443/RC0402FR-07100KL-Yageo-datasheet-10408619.pdf?src-supplier=Newark, ComponentLink3Description=https://datasheet.octopart.com:443/RC0402FR-07100KL-Yageo-datasheet-8324527.pdf?src-supplier=Newark, ComponentLink3URL=https://datasheet.octopart.com:443/RC0402FR-07100KL-Yageo-datasheet-8324527.pdf?src-supplier=Newark, ComponentLink4Description=https://datasheet.octopart.com:443/RC0402FR-07100KL-Yageo-datasheet-103092701.pdf?src-supplier=Upverter, ComponentLink4URL=https://datasheet.octopart.com:443/RC0402FR-07100KL-Yageo-datasheet-103092701.pdf?src-supplier=Upverter, ComponentLink5Description=https://datasheet.octopart.com:443/RC0402FR-07100KL-Yageo-datasheet-141435361.pdf?src-supplier=Upverter, ComponentLink5URL=https://datasheet.octopart.com:443/RC0402FR-07100KL-Yageo-datasheet-141435361.pdf?src-supplier=Upverter, ComponentLink6Description=https://datasheet.octopart.com:443/RC0402FR-07100KL-Yageo-datasheet-62067350.pdf?src-supplier=Farnell, ComponentLink6URL=https://datasheet.octopart.com:443/RC0402FR-07100KL-Yageo-datasheet-62067350.pdf?src-supplier=Farnell, ComponentLink7Description=https://datasheet.octopart.com:443/RC0402FR-07100KL-Yageo-datasheet-12531192.pdf?src-supplier=Future+Electronics, ComponentLink7URL=https://datasheet.octopart.com:443/RC0402FR-07100KL-Yageo-datasheet-12531192.pdf?src-supplier=Future+Electronics, ComponentLink8Description=https://datasheet.octopart.com:443/RC0402FR-07100KL-Yageo-Group-datasheet-176638170.pdf?src-supplier=Future+Electronics, ComponentLink8URL=https://datasheet.octopart.com:443/RC0402FR-07100KL-Yageo-Group-datasheet-176638170.pdf?src-supplier=Future+Electronics, ComponentLink9Description=https://datasheet.octopart.com:443/RC0402FR-07100KL-Yageo-datasheet-164759695.pdf?src-supplier=Future+Electronics, ComponentLink9URL=https://datasheet.octopart.com:443/RC0402FR-07100KL-Yageo-datasheet-164759695.pdf?src-supplier=Future+Electronics, ComponentLink10Description=https://datasheet.octopart.com:443/RC0402FR-07100KL-Yageo-datasheet-127823281.pdf?src-supplier=Future+Electronics, ComponentLink10URL=https://datasheet.octopart.com:443/RC0402FR-07100KL-Yageo-datasheet-127823281.pdf?src-supplier=Future+Electronics, ComponentLink11Description=https://datasheet.octopart.com:443/RC0402FR-07100KL-Yageo-datasheet-137700087.pdf?src-supplier=Future+Electronics, ComponentLink11URL=https://datasheet.octopart.com:443/RC0402FR-07100KL-Yageo-datasheet-137700087.pdf?src-supplier=Future+Electronics, ComponentLink12Description=https://datasheet.octopart.com:443/RC0402FR-07100KL-Yageo-datasheet-98239111.pdf?src-supplier=Future+Electronics, ComponentLink12URL=https://datasheet.octopart.com:443/RC0402FR-07100KL-Yageo-datasheet-98239111.pdf?src-supplier=Future+Electronics, ComponentLink13Description=https://datasheet.octopart.com:443/RC0402FR-07100KL-Yageo-datasheet-77992522.pdf?src-supplier=Future+Electronics, ComponentLink13URL=https://datasheet.octopart.com:443/RC0402FR-07100KL-Yageo-datasheet-77992522.pdf?src-supplier=Future+Electronics, ComponentLink14Description=https://datasheet.octopart.com:443/RC0402FR-07100KL-Yageo-datasheet-67302840.pdf?src-supplier=Future+Electronics, ComponentLink14URL=https://datasheet.octopart.com:443/RC0402FR-07100KL-Yageo-datasheet-67302840.pdf?src-supplier=Future+Electronics, ComponentLink15Description=https://datasheet.octopart.com:443/RC0402FR-07100KL-Yageo-datasheet-8324255.pdf?src-supplier=Future+Electronics, ComponentLink15URL=https://datasheet.octopart.com:443/RC0402FR-07100KL-Yageo-datasheet-8324255.pdf?src-supplier=Future+Electronics, ComponentLink16Description=https://datasheet.octopart.com:443/RC0402FR-07100KL-Yageo-datasheet-8329306.pdf?src-supplier=element14, ComponentLink16URL=https://datasheet.octopart.com:443/RC0402FR-07100KL-Yageo-datasheet-8329306.pdf?src-supplier=element14, ComponentLink17Description=https://datasheet.octopart.com:443/RC0402FR-07100KL-Yageo-datasheet-175423674.pdf?src-supplier=SOS+electronic, ComponentLink17URL=https://datasheet.octopart.com:443/RC0402FR-07100KL-Yageo-datasheet-175423674.pdf?src-supplier=SOS+electronic, ComponentLink18Description=https://datasheet.octopart.com:443/RC0402FR-07100KL-Yageo-datasheet-148775077.pdf?src-supplier=TME, ComponentLink18URL=https://datasheet.octopart.com:443/RC0402FR-07100KL-Yageo-datasheet-148775077.pdf?src-supplier=TME, ComponentLink19Description=https://datasheet.octopart.com:443/RC0402FR-07100KL-Yageo-datasheet-79472498.pdf?src-supplier=Megastar, ComponentLink19URL=https://datasheet.octopart.com:443/RC0402FR-07100KL-Yageo-datasheet-79472498.pdf?src-supplier=Megastar, ComponentLink20Description=https://datasheet.octopart.com/RC0402FR-07100KL-Yageo-datasheet-73766026.pdf, ComponentLink20URL=https://datasheet.octopart.com/RC0402FR-07100KL-Yageo-datasheet-73766026.pdf, ComponentLink21Description=http://sigma.octopart.com:80/conflict_mineral_statement/Yageo-company-3.pdf?src-supplier=Compliance+Statements, ComponentLink21URL=http://sigma.octopart.com:80/conflict_mineral_statement/Yageo-company-3.pdf?src-supplier=Compliance+Statements, ComponentLink22Description=http://sigma.octopart.com:80/rohs_statement/Yageo-company-2.pdf?src-supplier=Compliance+Statements, ComponentLink22URL=http://sigma.octopart.com:80/rohs_statement/Yageo-company-2.pdf?src-supplier=Compliance+Statements, Composition="Thick Film", Contact Plating=Tin, Depth=500µm, Features="Moisture Resistant", Height=350µm, Lead Free="Lead Free", Length=1mm, Lifecycle Status=Production, Manufacturer Part Number=RC0402FR-07100KL, Military Standard=Not, Mounting Technology="Surface Mount", Number of Terminals=2, Number of Terminations=2, Packaging="Cut Tape (CT)", Pins=2, Pricing="30000=0.0005, 150000=0.0005, 400000=0.0005, 1000000=0.0005, 2500000=0.0005 (USD)", Radiation Hardening=No, REACH SVHC=Yes, RoHS=Compliant, Schedule B="8533210045, 8533210045|8533210045, 8533210045|8533210045|8533210045, 8533210045|8533210045|8533210045|8533210045", Stock=11900000, Supplier="Future Electronics", Supplier Part Number=RC0402FR-07100KL, Termination=SMD/SMT, Voltage Rating (AC)=50V, Voltage Rating (DC)=50V, Width=500µm, Working Voltage=50V